# Altium PCB capsens.PcbDoc
Units mm, origin at the board's own origin, x right, y up, seen from the top; angles counter-clockwise.
Board outline 48.39 x 21.08 mm, 2 copper layers (Top Layer, Bottom Layer); 60 components, 46 nets, 152 pads, 11 vias.
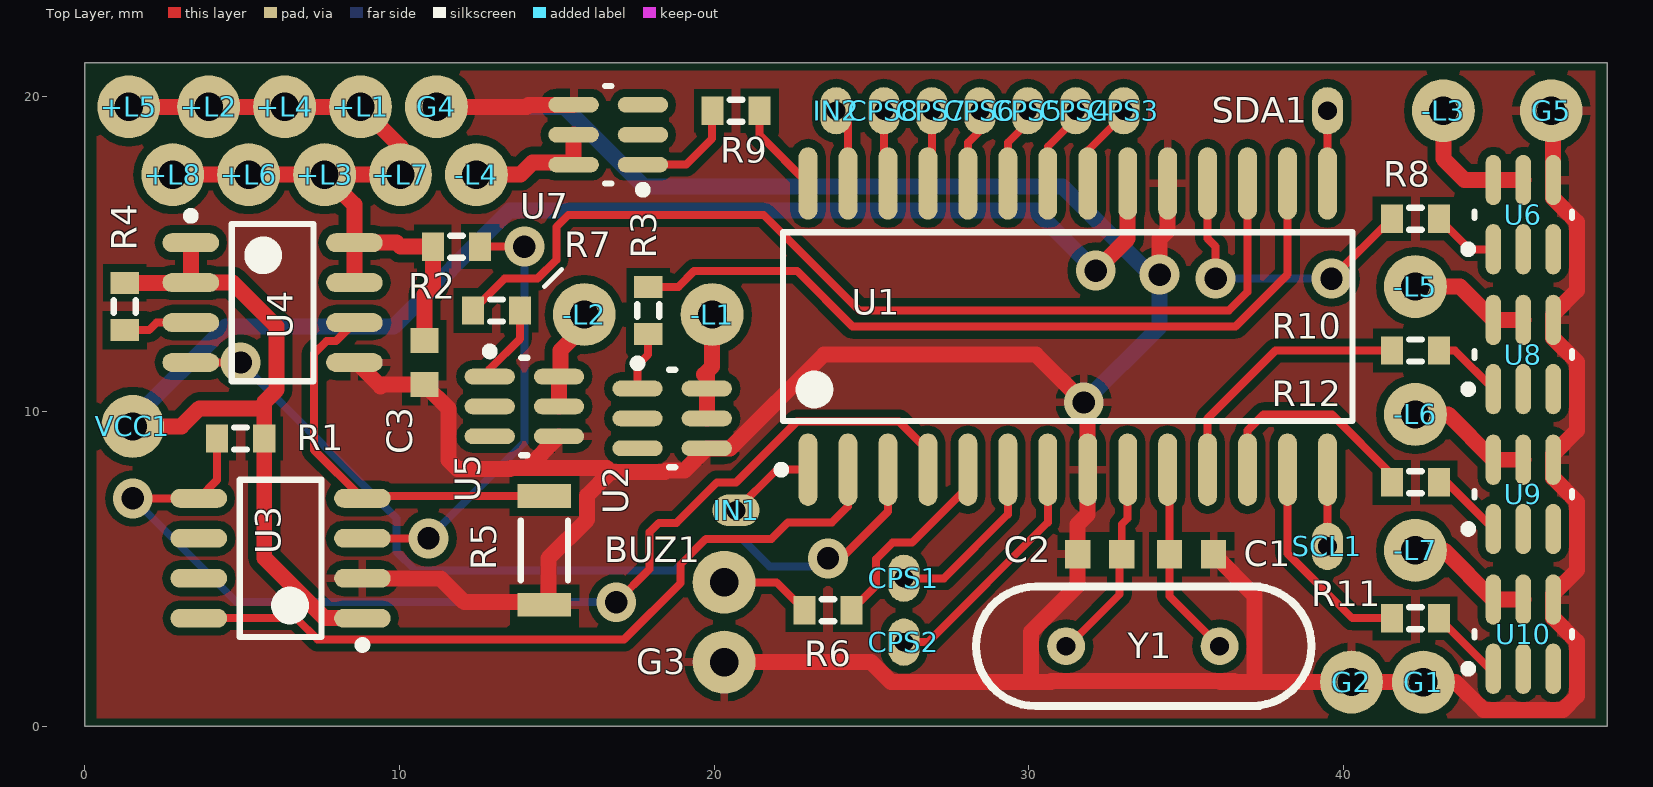
[diagram p0: Top Layer view]
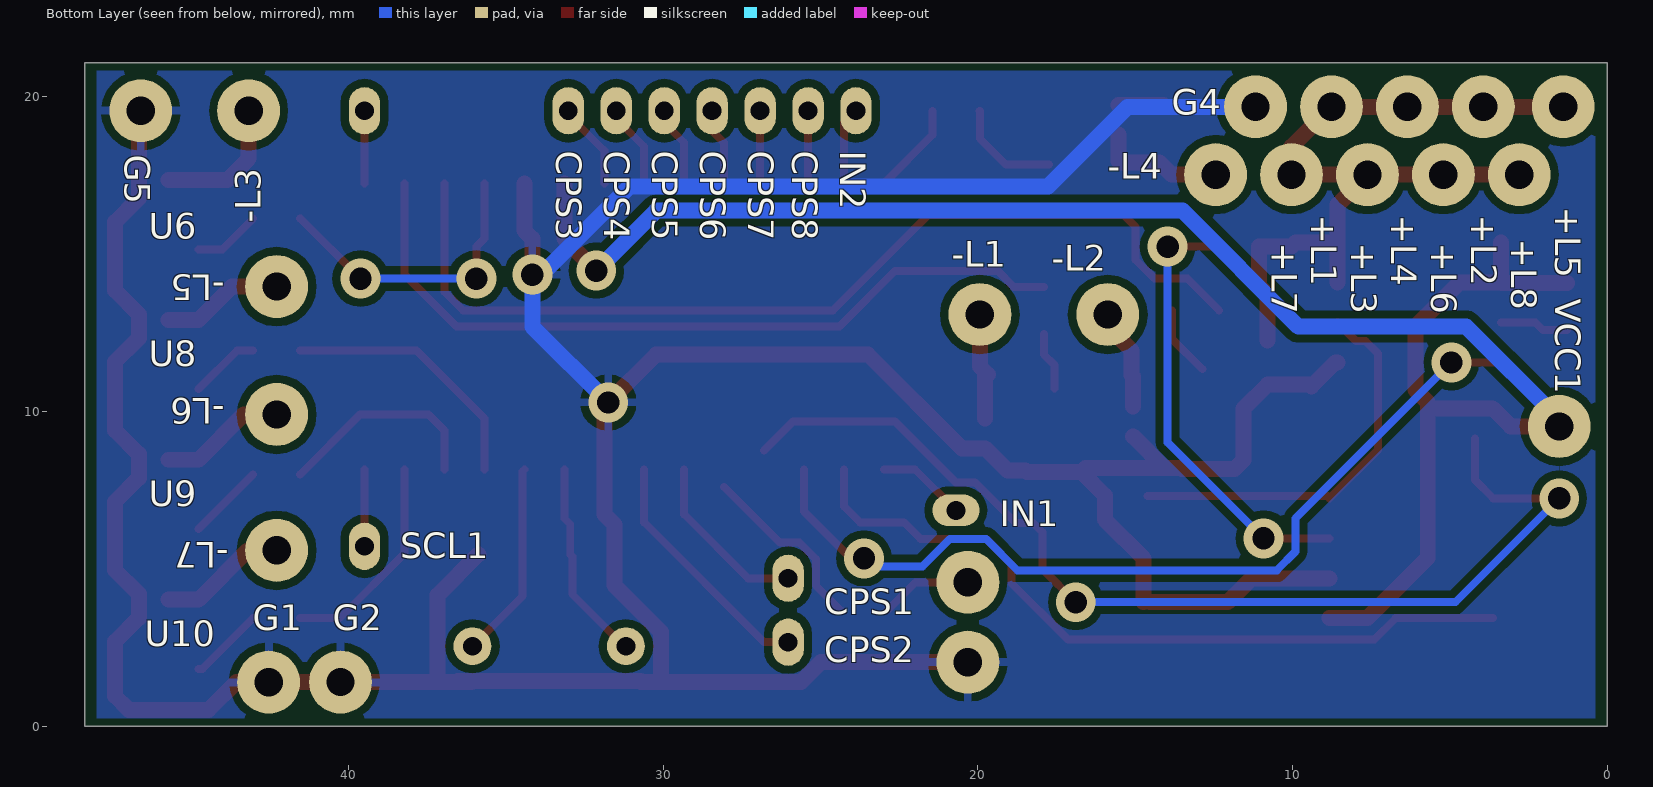
[diagram p1: Bottom Layer view, seen from below]

## Layer stack, top to bottom
Top Layer: signal copper 0.0356
Dielectric: dielectric 0.32, FR-4, Dk 4.8
Bottom Layer: signal copper 0.0356

## Board outline
0,0 0,21.082 48.387,21.082 48.387,0

## Design rules (kind name [scope] priority, off if disabled: settings)
Clearance [All] p1: gap=0.254
PolygonConnect [All] p1: connectstyle=Relief reliefconductorwidth=0.254 reliefentries=4 polygonreliefangle="90 Angle" airgapwidth=0.254
RoutingVias [All] p1: holewidth=0.711 width=1.27 viastyle="Through Hole" minholewidth=0.711 minwidth=1.27 maxholewidth=0.711 maxwidth=1.27
SilkToSilkClearance [All] p1: silktosilkclearance=0.216
SilkToSolderMaskClearance SilkToSolderMaskClearance_1 [HasFootprint('J1-0603')] p1: minsilkscreentomaskgap=0 clearancetoexposedcopper=TRUE
SilkToSolderMaskClearance [IsPad] p2: minsilkscreentomaskgap=0.178 clearancetoexposedcopper=TRUE
SolderMaskExpansion [All] p1: expansion=0.051
Width Width_1 [InNetClass('hc')] p1: maxlimit=0.508 minlimit=0.508 preferedwidth=0.508
Width [All] p2: maxlimit=0.254 minlimit=0.254 preferedwidth=0.254
26 further rules are at their usual default settings.

## Classes and differential pairs
net class hc: GND Net-L1_1 Net-L2_1 Net-L3_1 Net-L4_1 Net-L5_1 Net-L6_1 Net-L7_1 VCC VLED

## Components (designator, comment, footprint, x,y, rotation, side; value= is the part's Value field where it differs from the comment)
+L1 "+L" PIN1 8.763,19.685 r0 top
+L2 "+L" PIN1 3.937,19.685 r0 top
+L3 "+L" PIN1 7.62,17.526 r0 top
+L4 "+L" PIN1 6.35,19.685 r0 top
+L5 "+L" PIN1 1.397,19.685 r0 top
+L6 "+L" PIN1 5.207,17.526 r0 top
+L7 "+L" PIN1 10.033,17.526 r0 top
+L8 "+L" PIN1 2.794,17.526 r0 top
-L1 "-L" PIN1 19.939,13.081 r0 top
-L2 "-L" PIN1 15.875,13.081 r0 top
-L3 "-L" PIN1 43.18,19.558 r0 top
-L4 "-L" PIN1 12.446,17.526 r0 top
-L5 "-L" PIN1 42.291,13.97 r0 top
-L6 "-L" PIN1 42.291,9.906 r0 top
-L7 "-L" PIN1 42.291,5.588 r0 top
BUZ1 "BUZ" PIN1 20.32,4.572 r90 top
C1 "62pF" 1608[0603] 35.179,5.461 r180 top
C2 "62pF" 1608[0603] 32.258,5.461 r0 top
C3 "0.47uF" 1608[0603] 10.795,11.557 r90 top
CPS1 "CPS" PIN1L 26.035,4.699 r180 top
CPS2 "CPS" PIN1L 26.035,2.667 r180 top
CPS3 "CPS" PIN1L 33.02,19.558 r180 top
CPS4 "CPS" PIN1L 31.496,19.558 r180 top
CPS5 "CPS" PIN1L 29.972,19.558 r180 top
CPS6 "CPS" PIN1L 28.448,19.558 r180 top
CPS7 "CPS" PIN1L 26.924,19.558 r180 top
CPS8 "CPS" PIN1L 25.4,19.558 r180 top
G1 "GND" PIN1 42.545,1.397 r0 top
G2 "GND" PIN1 40.259,1.4 r0 top
G3 "GND" PIN1 20.32,2.032 r0 top
G4 "GND" PIN1 11.176,19.685 r0 top
G5 "GND" PIN1 46.609,19.558 r0 top
IN1 "IN" PIN1L 20.701,6.858 r90 top
IN2 "IN" PIN1L 23.876,19.558 r0 top
R1 "22k" J1-0603 4.953,9.144 r180 top
R2 "3.3k" J1-0603 11.811,15.24 r180 top
R3 "1.2k" J1-0603 17.907,13.208 r90 top
R4 "100k" J1-0603 1.27,13.335 r90 top
R5 "1.75k 0.1%" R1206 14.605,5.588 r270 top
R6 "330" J1-0603 23.622,3.683 r0 top
R7 "1.2k" J1-0603 13.081,13.208 r180 top
R8 "1.2k" J1-0603 42.291,16.129 r180 top
R9 "1.2k" J1-0603 20.701,19.558 r0 top
R10 "1.2k" J1-0603 42.291,11.938 r180 top
R11 "1.2k" J1-0603 42.291,3.429 r0 top
R12 "1.2k" J1-0603 42.291,7.747 r0 top
SCL1 "SCL" PIN1L 39.497,5.715 r180 top
SDA1 "SDA" PIN1L 39.497,19.558 r180 top
U1 "PIC16F1938-I/SN" SOIC-SO28_N 31.242,12.7 r90 top
U2 "PMD3001D" SOT457 18.669,9.779 r0 top
U3 "MCP4011" SOIC150-8_N 6.223,5.334 r180 top
U4 "AP7167" SOIC150-8_N 5.969,13.462 r0 top
U5 "PMD3001D" SOT457 13.97,10.16 r0 top
U6 "PMD3001D" SOT457 45.72,16.256 r90 top
U7 "PMD3001D" SOT457 16.637,18.796 r180 top
U8 "PMD3001D" SOT457 45.72,11.811 r90 top
U9 "PMD3001D" SOT457 45.72,7.366 r90 top
U10 "PMD3001D" SOT457 45.72,2.921 r90 top
VCC1 "+5V" PIN1 1.524,9.525 r90 top
Y1 "8Mhz" XTAL 36.068,2.54 r180 top

## Footprints (in the part's own frame and the unit in brackets; to place one, negate y for a bottom-side part, rotate by r counter-clockwise, add the part's x,y. Pads: shape width x height; smd on the part's side, far side on the other; paste and mask are expansions set on the pad)
1608[0603] [mm] "Chip Capacitor, Body 1.6x0.8mm, IPC High Density"
  rect 0.8x0.9 smd: 1(-0.7,0) 2(0.7,0)
  body extent -0.87,-0.48 0.87,0.48, height 1.3
J1-0603 [mm] "Chip Resistor, Body 1.6x0.8mm, IPC High Density"
  rect 0.7x0.9 smd: 1(-0.75,0) 2(0.75,0)
  silkscreen extent -0.2,-0.35 0.2,0.35, body extent -0.85,-0.48 0.85,0.48, height 0.9
PIN1 [mm] "Connector; Plug"
  round 2 hole 0.9: 1(0,0)
PIN1L [mm] "Connector; Plug"
  oval 1x1.5 hole 0.6: 1(0,0)
R1206 [mm] "Chip Resistor, 2-Leads, Body 3.20x1.60mm, IPC Medium Density"
  rect 0.75x1.7 smd: 1(-1.725,0) 2(1.725,0)
  silkscreen extent -0.95,-0.75 0.95,0.75, body extent -1.6,-0.8 1.6,0.8, height 0.6
SOIC150-8_N [mm] "8-Pin Plastic Narrow Body Small Outline Integrated Circuit 1.27 mm Pitch, IPC Medium Density"
  oval 1.8x0.6 smd: 1(-2.6,1.905) 2(-2.6,0.635) 3(-2.6,-0.635) 4(-2.6,-1.905) 5(2.6,-1.905) 6(2.6,-0.635) 7(2.6,0.635) 8(2.6,1.905)
  silkscreen extent -2.73,-2.5 1.3,2.88, body extent -2,-2.5 2,2.5, height 1.76
SOIC-SO28_N [mm] "SOIC, 28-Leads, Body 17.9x7.5mm, Pitch 1.27mm, IPC Medium Density"
  oval 2.3x0.6 smd: 1(-4.55,8.255) 2(-4.55,6.985) 3(-4.55,5.715) 4(-4.55,4.445) 5(-4.55,3.175) 6(-4.55,1.905) 7(-4.55,0.635) 8(-4.55,-0.635) 9(-4.55,-1.905) 10(-4.55,-3.175) 11(-4.55,-4.445) 12(-4.55,-5.715) 13(-4.55,-6.985) 14(-4.55,-8.255) 15(4.55,-8.255) 16(4.55,-6.985) 17(4.55,-5.715) 18(4.55,-4.445) 19(4.55,-3.175) 20(4.55,-1.905) 21(4.55,-0.635) 22(4.55,0.635) 23(4.55,1.905) 24(4.55,3.175) 25(4.55,4.445) 26(4.55,5.715) 27(4.55,6.985) 28(4.55,8.255)
  silkscreen extent -4.67,-9.05 3,9.23, body extent -3.8,-9.06 3.8,9.06, height 2.65
SOT457 [mm]
  oval 1.6x0.5 smd: 1(-1.1,0.95) 2(-1.1,0) 3(-1.1,-0.95) 4(1.1,-0.95) 5(1.1,0) 6(1.1,0.95)
  silkscreen extent -1.22,-1.55 0.1,1.87, body extent -0.85,-1.55 0.85,1.55, height 1.1
XTAL [mm]
  round 1.2 hole 0.6: 1(0,0) 2(4.88,0)
  silkscreen extent -2.92,-1.9 7.74,1.91

## Part data
+L1 +L2 +L3 +L4 +L5 +L6 +L7 +L8 -L1 -L2 -L3 -L4 -L5 -L6 -L7 BUZ1 CPS1 CPS2 CPS3 CPS4 CPS5 CPS6 CPS7 CPS8 G1 G2 G3 G4 G5 IN1 IN2 SCL1 SDA1 VCC1: library part Socket, "Socket"
C1 C2 C3: library part Cap, "Capacitor"
R1 R2 R3 R4 R5 R6 R7 R8 R9 R10 R11 R12: library part Res3, "Resistor"
U1: library part PIC16F1936-I/SO, "CMOS Microcontroller with LCD Driver, 8K (words) Program Memory, 256 Bytes Data Memory, 512 Bytes SRAM, 25 I/O's, 28-Pin SOIC, Industrial Temperature"
Y1: library part XTAL, "Crystal Oscillator"

## Via types
v1: diameter 1.27, hole 0.711, Top Layer to Bottom Layer, 11 vias

## Nets (pads, with @x,y where several pads share a name; then routed paths per layer and width w, separated by ;. In a path a pad name is that pad's centre, name@x,y a point inside that pad or via, vN(x,y) a via of type N, cw(c..) or ccw(c..) an arc to the next point about the centre after c; other vN are vias at no path point)
GND: C1.1 C2.1 C3.1 G1.1 G2.1 G3.1 G4.1 G5.1 R5.2 U1.8 U1.19 U2.4 U3.2 U4.5 U5.4 U6.4 U7.4 U8.4 U9.4 U10.4 | length 141.3
  Top Layer w0.508: U4.5 8.636,11.557 9.398,10.795 9.46,10.857 C3.1 11.562,10.09 11.562,8.452 11.849,8.166 13.514,8.166 13.545,8.196 14.056,8.196 ; U3.2 11.303,4.699 12.065,3.937 R5.2@14.531,3.937 ; G4.1 14.036,19.685 14.097,19.746 U7.4 ; R5.2@14.732,3.937 14.732,5.334 15.963,6.565 15.963,7.329 16.705,8.071 ; U5.4 14.056,8.196 ; G3.1 24.994,2.032 25.617,1.409 30.706,1.409 ; 30.08,1.524 30.08,2.999 31.558,4.477 C2.1 31.558,6.412 31.877,6.731 U1.8 31.877,10.16 v1(31.75,10.287) 30.226,11.811 23.495,11.811 20.513,8.829 U2.4 19.068,8.128 18.49,8.128 18.433,8.071 16.705,8.071 ; 30.729,1.432 36.068,1.432 ; v1(34.163,14.351) 34.163,15.494 34.417,15.748 U1.19 ; C1.1 37.176,4.164 37.176,1.397 ; 36.527,1.432 36.068,1.432 ; G5.1 46.67,19.497 U6.4 46.67,16.778 47.428,16.02 47.428,13.848 46.67,13.09 U8.4 46.67,12.333 47.428,11.575 47.428,9.403 46.67,8.645 U9.4 46.67,7.888 47.428,7.13 47.428,4.958 46.67,4.2 U10.4 46.67,3.443 47.428,2.685 47.428,0.957 46.984,0.513 44.456,0.513 43.572,1.397 42.291,1.397 40.005,1.397 37.176,1.397 ; 14.056,8.196 16.58,8.196 16.705,8.071 ; 36.068,1.432 36.103,1.397 37.176,1.397
  Bottom Layer w0.508: G4.1 15.24,19.685 17.78,17.145 31.08,17.145 33.874,14.351 v1(34.163,14.351) 34.163,12.7 v1(31.75,10.287)
Net-L1_1: -L1.1 U2.5 U2.6 | length 3.4
  Top Layer w0.508: U2.5 U2.6 19.769,11.092 19.685,11.176 19.939,11.43 -L1.1
Net-L2_1: -L2.1 U5.5 U5.6 | length 3.3
  Top Layer w0.508: U5.5 U5.6 15.113,11.153 15.113,11.938 15.875,12.7 -L2.1
Net-L3_1: -L3.1 U6.5 U6.6 | length 4.3
  Top Layer w0.508: -L3.1 43.18,18.034 43.858,17.356 U6.6 U6.5
Net-L4_1: -L4.1 U7.5 U7.6 | length 4.1
  Top Layer w0.508: -L4.1 13.843,17.526 14.224,17.907 15.476,17.907 15.537,17.968 U7.5
Net-L5_1: -L5.1 U8.5 U8.6 | length 3.9
  Top Layer w0.508: -L5.1 43.711,13.97 U8.6 U8.5
Net-L6_1: -L6.1 U9.5 U9.6 | length 4
  Top Layer w0.508: -L6.1 43.33,9.906 U9.6 U9.5
Net-L7_1: -L7.1 U10.5 U10.6 | length 4.1
  Top Layer w0.508: -L7.1 43.203,5.588 U10.6 U10.5
NetBUZ1_1: BUZ1.1 R6.1 | length 2.9
  Top Layer w0.254: BUZ1.1 21.983,4.572 R6.1
NetC1_2: C1.2 U1.10 Y1.1 | length 6.3
  Top Layer w0.254: U1.10 34.479,8.088 C1.2 34.479,4.129 Y1.1
NetC2_2: C2.2 U1.9 Y1.2 | length 6.5
  Top Layer w0.254: Y1.2 31.242,2.54 32.893,4.191 32.893,5.396 C2.2 32.958,6.415 33.147,6.604 U1.9
NetCPS1_1: CPS1.1 U1.6 | length 5.6
  Top Layer w0.254: CPS1.1 27.305,4.699 29.337,6.731 U1.6
NetCPS2_1: CPS2.1 U1.7 | length 7.8
  Top Layer w0.254: CPS2.1 26.797,2.667 30.607,6.477 U1.7
NetCPS3_1: CPS3.1 U1.21 | length 2.8
  Top Layer w0.254: U1.21 31.877,18.288 33.02,19.431 CPS3.1
NetCPS4_1: CPS4.1 U1.22 | length 2.7
  Top Layer w0.254: U1.22 30.607,18.415 31.496,19.304 CPS4.1
NetCPS5_1: CPS5.1 U1.23 | length 2.6
  Top Layer w0.254: U1.23 29.337,18.542 29.972,19.177 CPS5.1
NetCPS6_1: CPS6.1 U1.24 | length 2.5
  Top Layer w0.254: U1.24 28.067,18.542 28.448,18.923 CPS6.1
NetCPS7_1: CPS7.1 U1.25 | length 2.4
  Top Layer w0.254: U1.25 26.924,17.377 CPS7.1
NetCPS8_1: CPS8.1 U1.26 | length 2.4
  Top Layer w0.254: CPS8.1 25.4,17.377 U1.26
NetIN1_1: IN1.1 U1.1 | length 2.8
  Top Layer w0.254: IN1.1 21.993,8.15 U1.1
NetIN2_1: IN2.1 U1.27 | length 2.5
  Top Layer w0.254: IN2.1 24.257,19.177 U1.27
NetR1_2: R1.2 U1.4 U3.5 | length 34.3
  Top Layer w0.254: v1(1.524,7.239) U3.5 4.203,7.819 R1.2 ; v1(16.891,3.937) 17.951,4.997 17.951,6.163 18.248,6.461 18.808,6.461 20.086,7.739 20.693,7.739 22.635,9.681 25.879,9.681 U1.4@26.797,8.763
  Bottom Layer w0.254: v1(1.524,7.239) 4.826,3.937 v1(16.891,3.937)
NetR2_1: R2.1 U3.3 | length 14
  Top Layer w0.254: U3.3 v1(10.922,5.969) ; R2.1 v1(13.97,15.24)
  Bottom Layer w0.254: v1(10.922,5.969) 13.97,9.017 v1(13.97,15.24)
NetR3_1: R3.1 U2.1 | length 1.9
  Top Layer w0.254: U2.1 17.569,11.473 17.907,11.811 R3.1
NetR3_2: R3.2 U1.16 | length 24.8
  Top Layer w0.254: R3.2 18.863,13.958 19.367,14.462 22.642,14.462 24.404,12.7 36.572,12.7 38.227,14.355 U1.16
NetR4_1: R4.1 U4.3 | length 2.2
  Top Layer w0.254: R4.1 2.044,12.585 2.286,12.827 U4.3
NetR5_1: R5.1 U3.4 U4.6 | length 12.7
  Top Layer w0.254: U4.6 7.98,12.238 7.687,12.238 7.288,11.839 7.288,8.774 U3.4 8.897,7.313 R5.1
NetR6_2: R6.2 U1.5 | length 5.8
  Top Layer w0.254: R6.2 25.154,4.465 25.154,5.314 25.67,5.83 26.29,5.83 U1.5@28.067,7.607
NetR7_1: R7.1 U5.1 | length 2.3
  Top Layer w0.254: U5.1@12.87,11.346 13.831,12.307 R7.1
NetR7_2: R7.2 U1.17 | length 31.4
  Top Layer w0.254: R7.2 13.347,14.224 14.391,14.224 14.986,14.819 14.986,15.863 15.367,16.244 21.578,16.244 24.614,13.208 36.068,13.208 36.362,13.208 36.957,13.803 36.957,14.097 U1.17
NetR8_1: R8.1 U6.1 | length 2.1
  Top Layer w0.254: R8.1 44.014,15.156 U6.1
NetR8_2: R8.2 U1.18 | length 9.5
  Top Layer w0.254: U1.18 35.687,15.494 35.941,15.24 v1(35.941,14.224) ; v1(39.624,14.224) 41.529,16.129 R8.2
  Bottom Layer w0.254: v1(35.941,14.224) v1(39.624,14.224)
NetR9_1: R9.1 U7.1 | length 3.4
  Top Layer w0.254: U7.1 19.116,17.846 19.939,18.669 19.939,19.546 R9.1
NetR9_2: R9.2 U1.28 | length 2.9
  Top Layer w0.254: R9.2 21.451,18.786 U1.28
NetR10_1: R10.1 U8.1 | length 2.2
  Top Layer w0.254: R10.1 43.543,11.938 U8.1
NetR10_2: R10.2 U1.11 | length 8.4
  Top Layer w0.254: U1.11 35.687,9.779 37.846,11.938 R10.2
NetR11_1: R11.1 U1.13 | length 6.8
  Top Layer w0.254: U1.13 38.227,5.489 40.287,3.429 R11.1
NetR11_2: R11.2 U10.1 | length 2.4
  Top Layer w0.254: R11.2 44.649,1.821 U10.1
NetR12_1: R12.1 U1.12 | length 6.8
  Top Layer w0.254: U1.12 36.957,9.398 37.465,9.906 39.636,9.906 R12.1@41.541,8.001
NetR12_2: R12.2 U9.1 | length 2.5
  Top Layer w0.254: R12.2@43.041,8.001 43.041,7.995 U9.1
NetSCL1_1: SCL1.1 U1.14 | length 2.4
  Top Layer w0.254: SCL1.1 U1.14
NetSDA1_1: SDA1.1 U1.15 | length 2.3
  Top Layer w0.254: U1.15 SDA1.1
NetU1_2: U1.2 U3.8 | length 24.2
  Top Layer w0.254: U3.8 6.722,3.429 7.403,2.748 17.139,2.748 18.939,4.548 18.939,5.144 19.748,5.953 21.828,5.953 22.352,6.477 23.749,6.477 24.257,6.985 U1.2
NetU1_3: U1.3 U4.4 | length 28.4
  Top Layer w0.254: U4.4 v1(4.953,11.557) ; v1@23.769,5.06 25.527,6.818 U1.3
  Bottom Layer w0.254: v1(4.953,11.557) 9.906,6.604 9.906,5.548 10.501,4.953 18.748,4.953 19.748,5.953 20.892,5.953 21.765,5.08 23.749,5.08 v1@23.769,5.06
  other v1: 23.622,5.334
VCC: R1.1 R4.2 U1.20 U3.1 U4.1 U4.2 VCC1.1 | length 60
  Top Layer w0.508: R4.2 3.357,14.085 U4.2 ; VCC1.1 3.066,9.525 3.643,10.102 5.588,10.102 ; U4.1 U4.2 ; U3.1 7.62,3.429 5.703,5.346 R1.1 5.703,10.298 6.096,10.691 6.096,12.7 4.699,14.097 U4.2 ; v1(32.131,14.478) 33.147,15.494 U1.20
  Bottom Layer w0.508: VCC1.1 1.524,9.744 4.48,12.7 9.814,12.7 13.497,16.383 30.226,16.383 v1(32.131,14.478)
VLED: +L1.1 +L2.1 +L3.1 +L4.1 +L5.1 +L6.1 +L7.1 +L8.1 C3.2 R2.2 U4.7 U4.8 | length 26.7
  Top Layer w0.508: +L5.1 +L2.1 +L4.1 +L1.1 10.033,18.415 +L7.1 +L3.1 ; +L8.1 +L6.1 +L3.1 ; U4.7 U4.8 ; C3.2 10.795,13.716 11.061,13.982 R2.2 10.033,15.24 9.906,15.367 U4.8 ; +L3.1 8.569,16.577 U4.8
pads on no net: U2.2 U2.3 U3.6 U3.7 U5.2 U5.3 U6.2 U6.3 U7.2 U7.3 U8.2 U8.3 U9.2 U9.3 U10.2 U10.3

## Polygon pours and split planes (outlines as drawn)
GND on Top Layer "Top Layer-No Net" (solid, pour order 25): 48.006,20.828 48.006,0.254 0.633,0.254 0.381,0.254 0.381,20.828
GND on Bottom Layer "Top Layer-No Net" (solid, pour order 23): 48.006,20.828 48.006,0.254 0.508,0.254 0.381,0.254 0.381,20.828

## Silkscreen, mask and mechanical layers (free items; w line width, h text height)
Top Overlay:
  lines w0.152: 14.605,13.97 15.157,14.522